# Altium PCB REF-Base.PcbDoc (part 1 of 2)
Units mm, origin at the board's own origin, x right, y up, seen from the top; angles counter-clockwise.
Board outline 48.01 x 58 mm, 4 copper layers (Top1, VCC, GND, Bottom2), stack 1.833 mm thick; 98 components, 129 nets, 444 pads, 192 vias.
Unrouted connection lines stored in the file: 57.
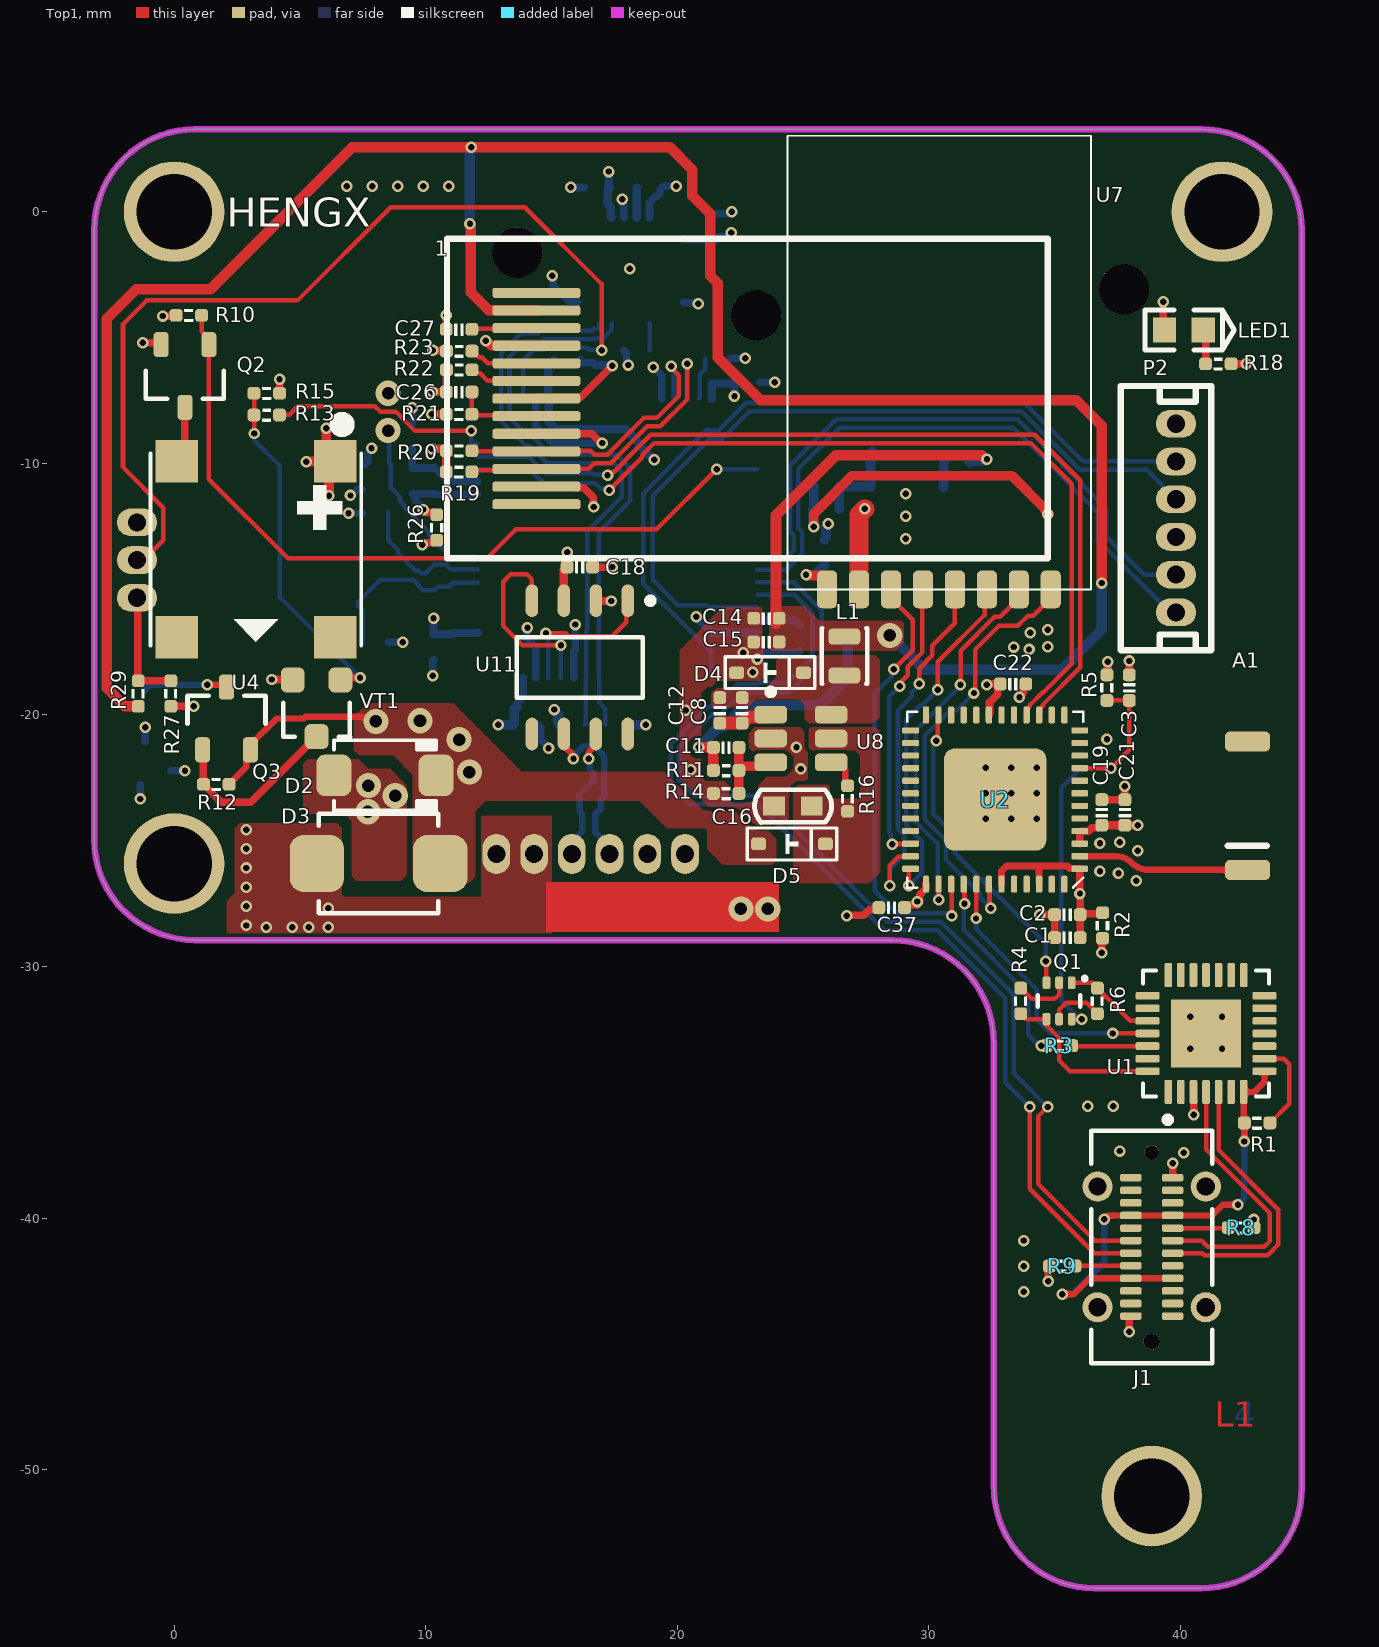
[diagram p0: Top1 view]
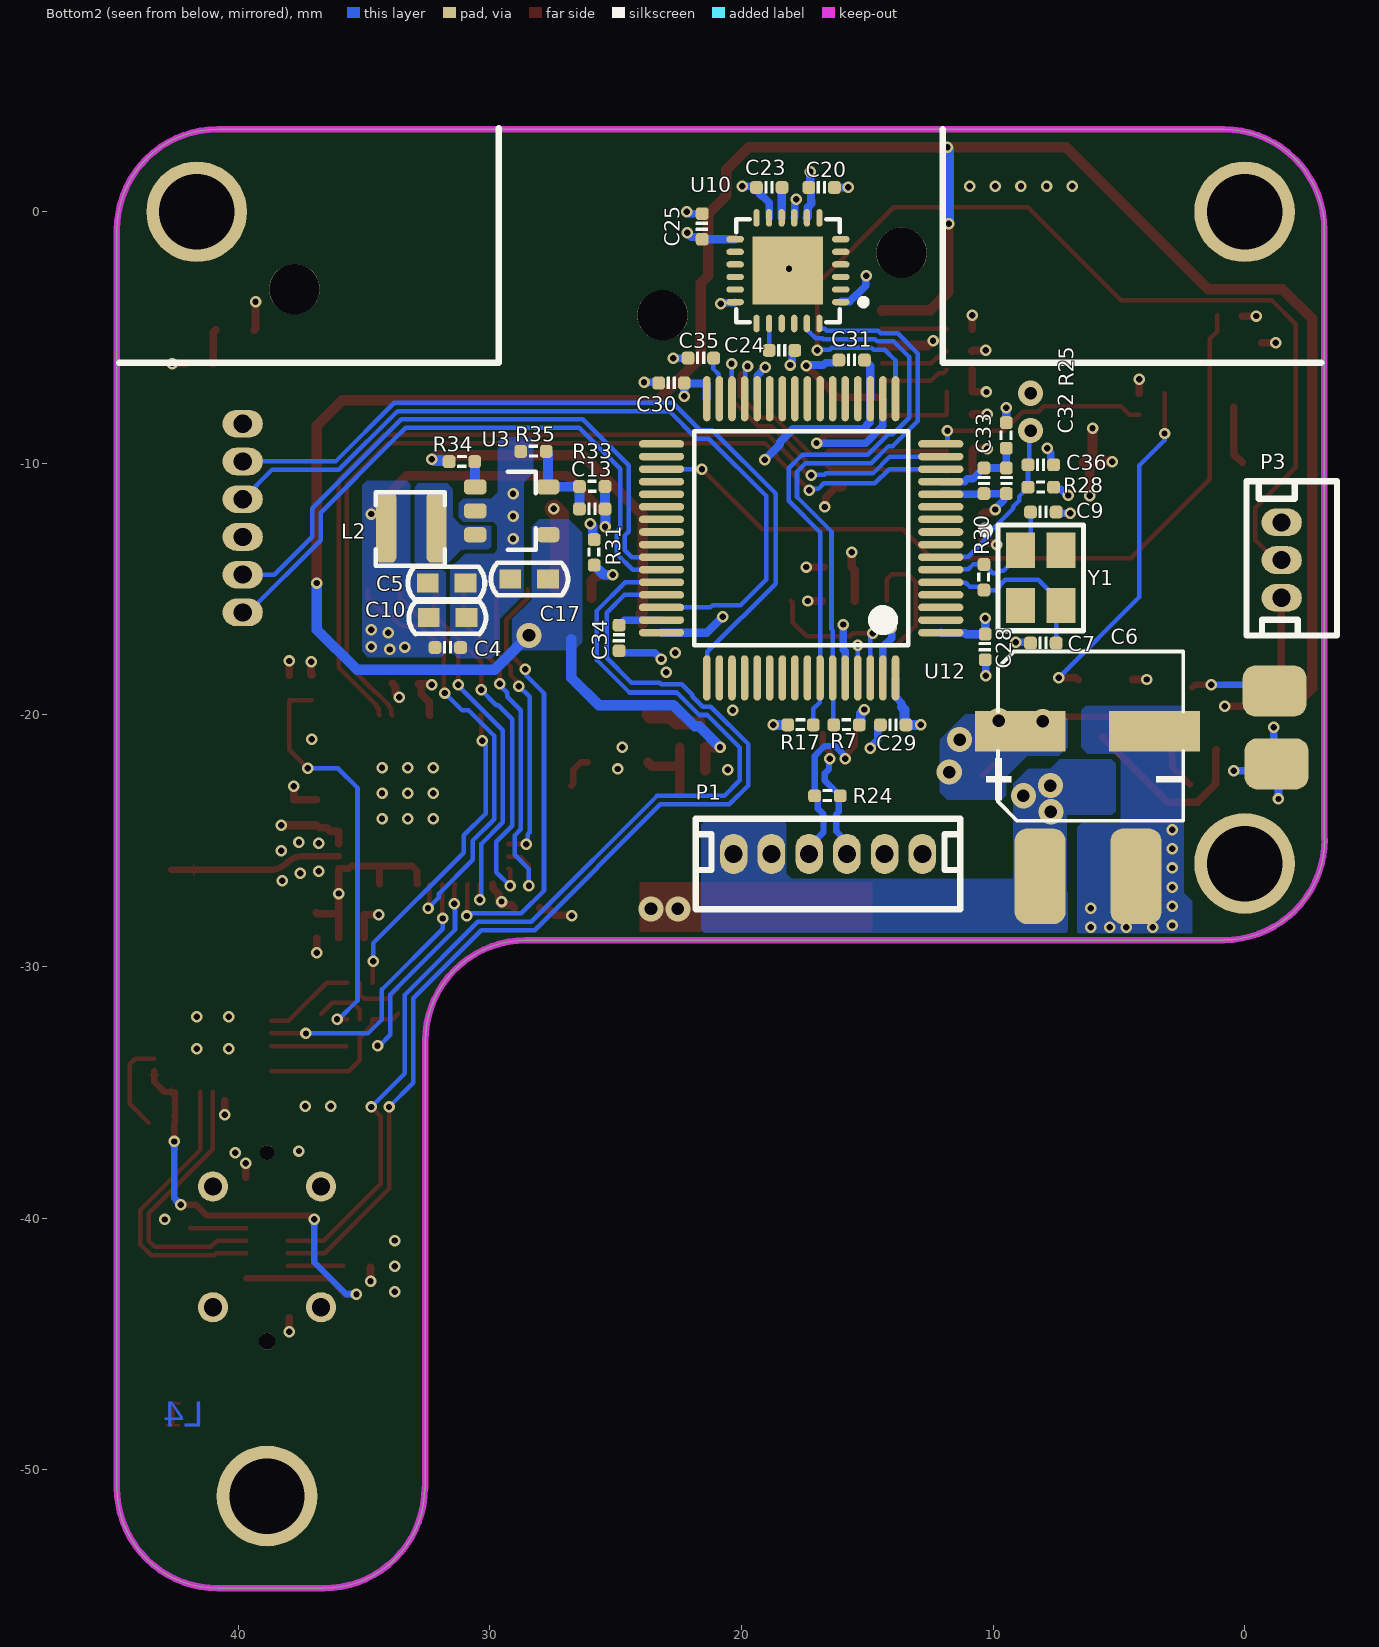
[diagram p1: Bottom2 view, seen from below]
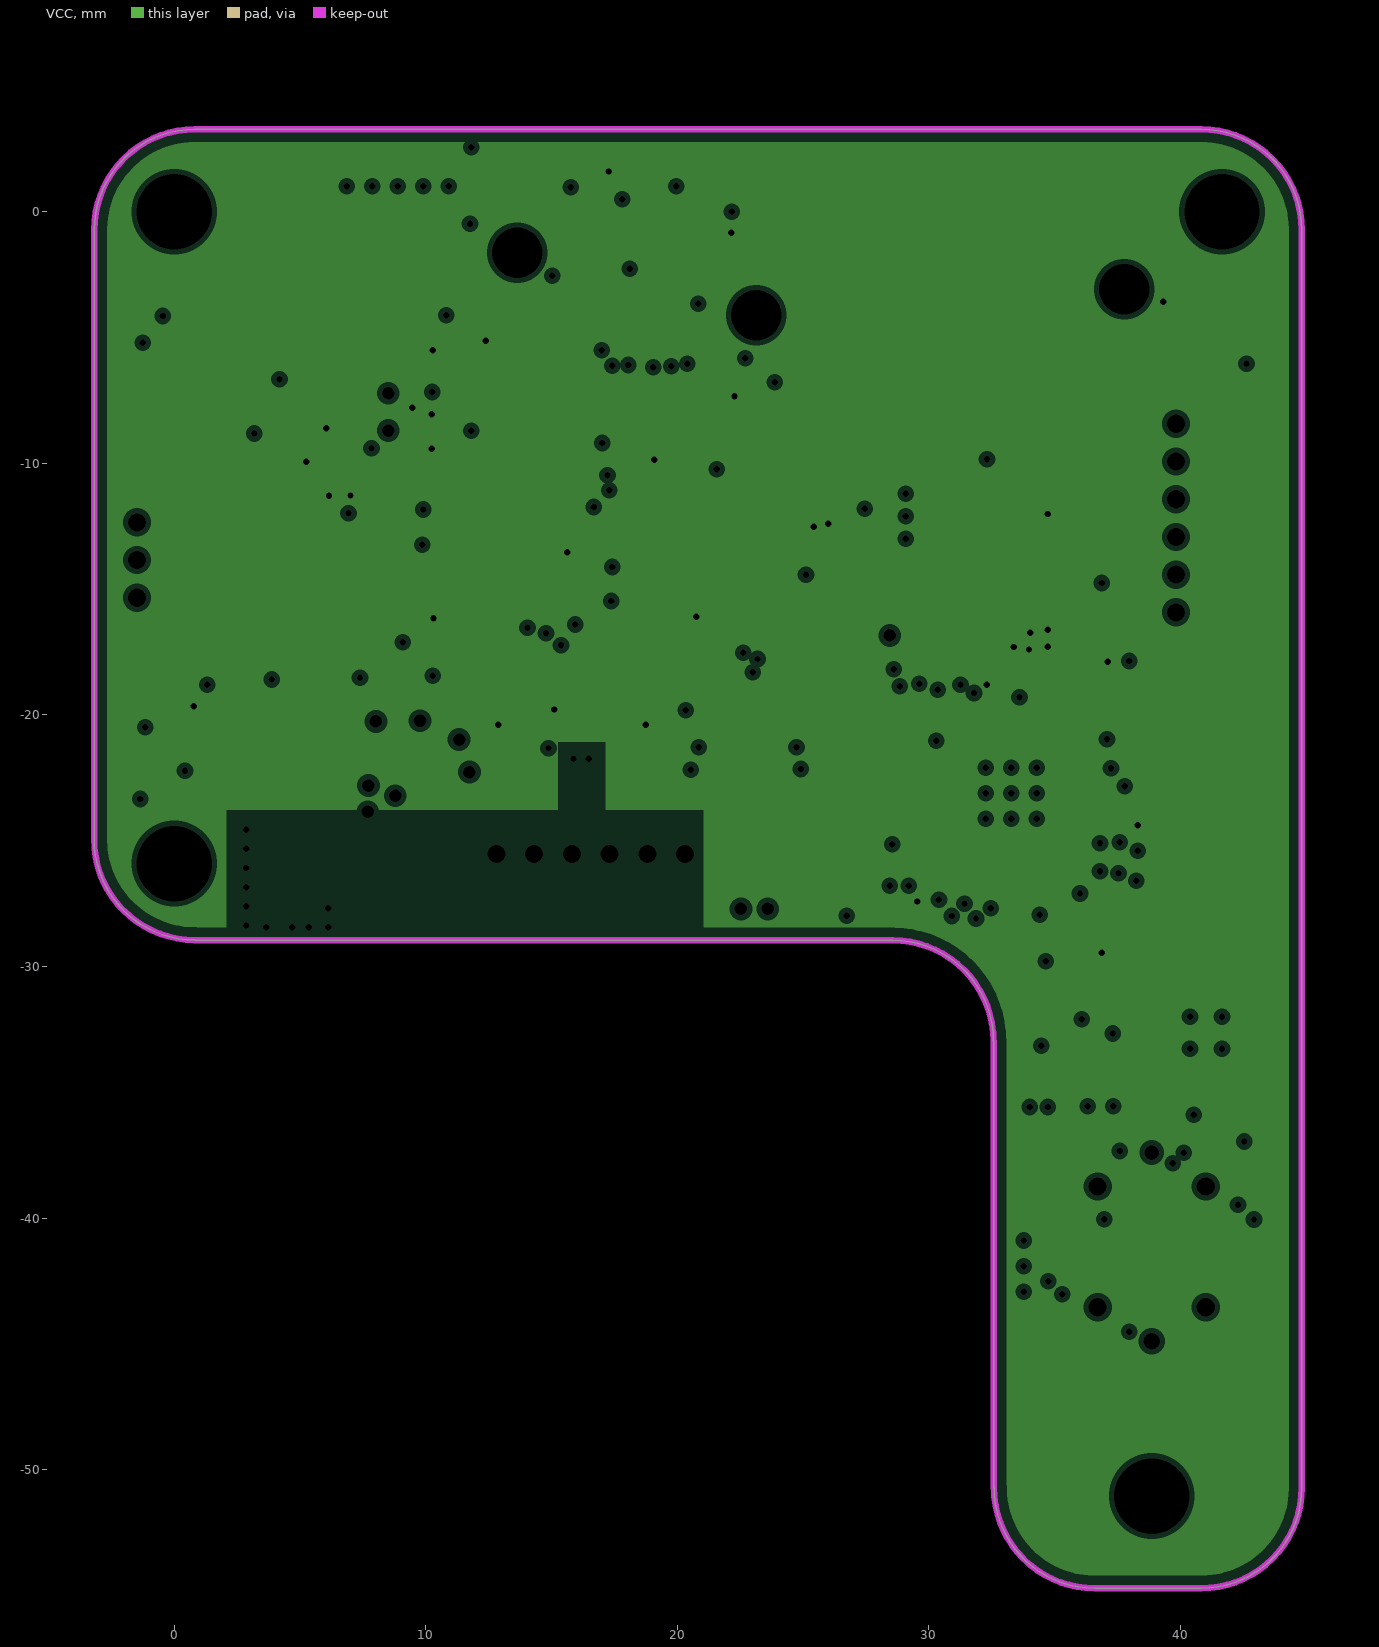
[diagram p2: VCC, clearances drawn from the general rule]
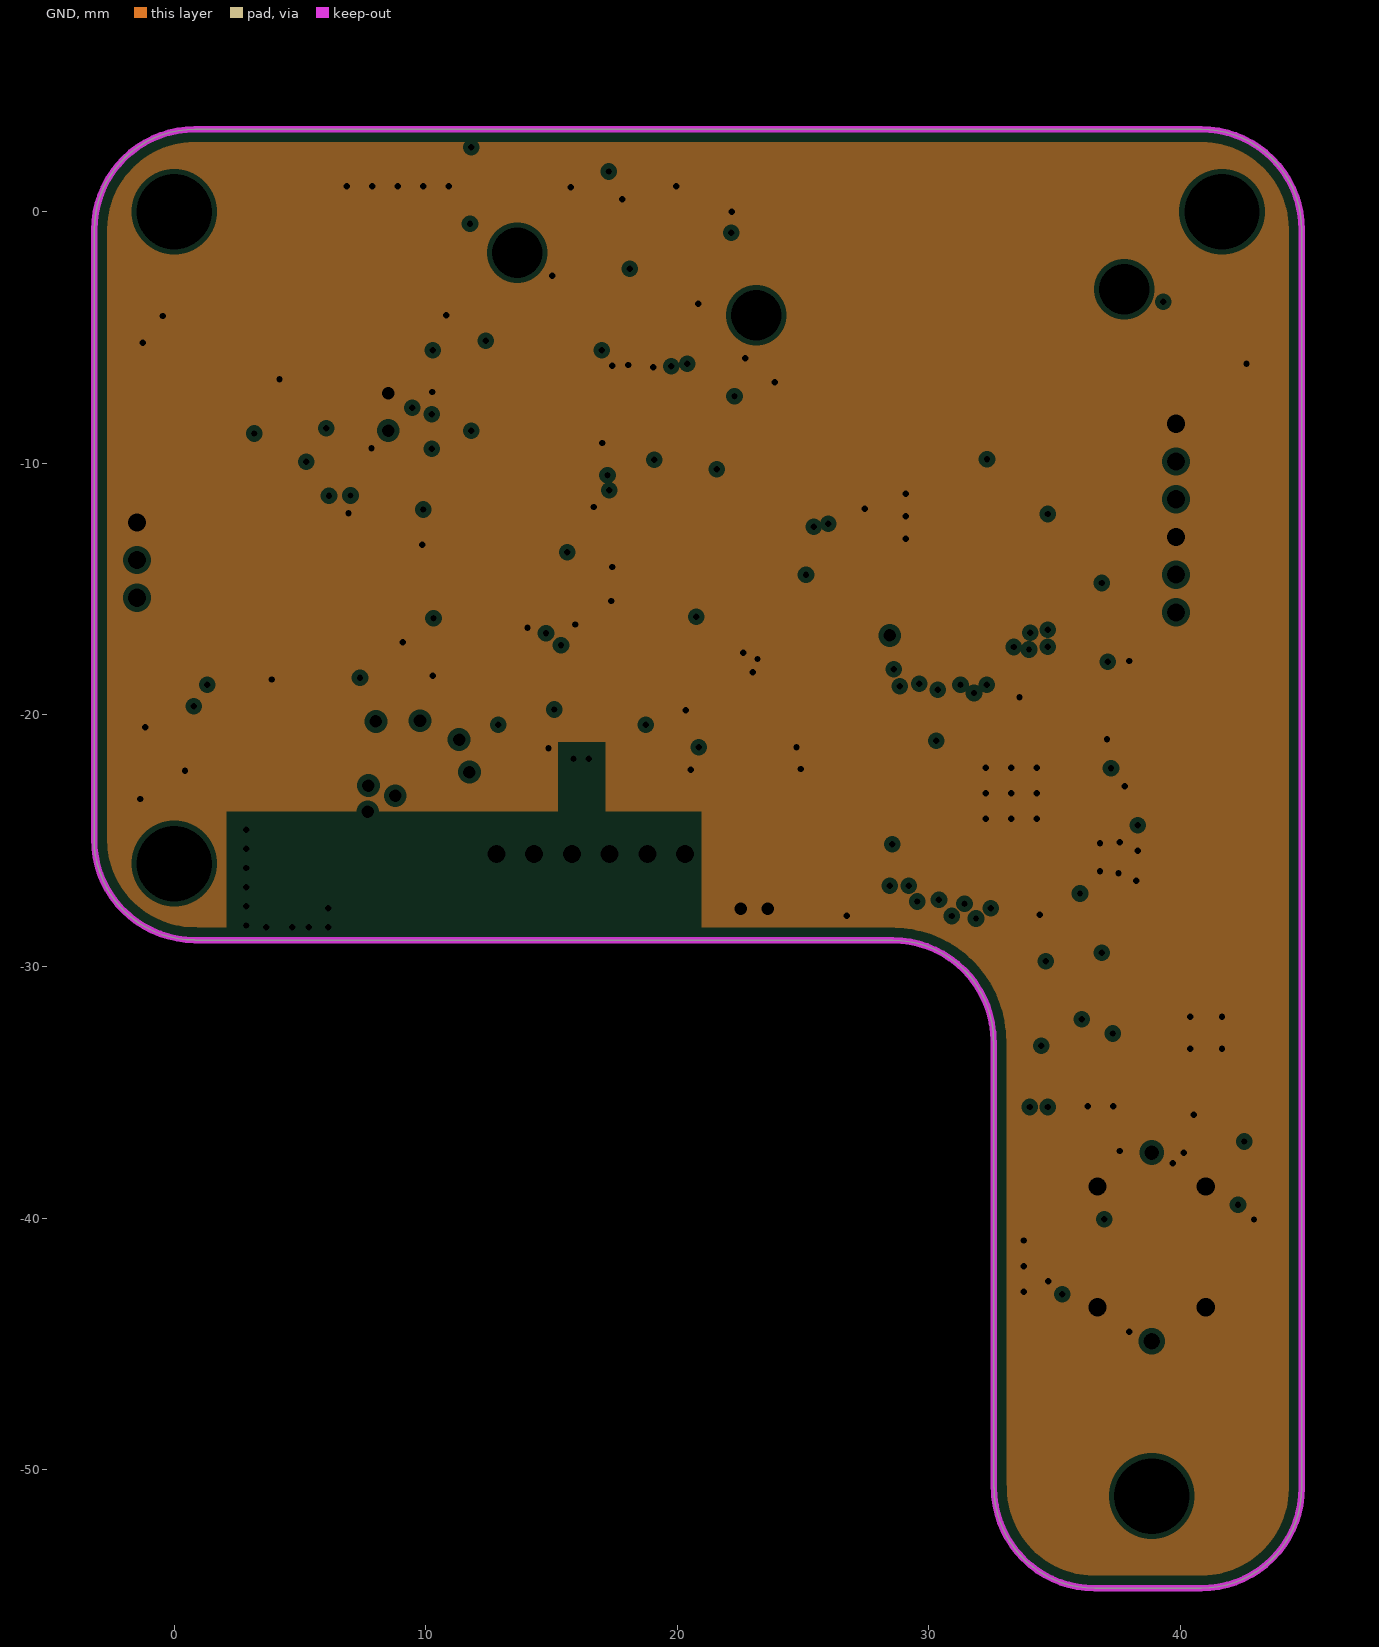
[diagram p3: GND, clearances drawn from the general rule]
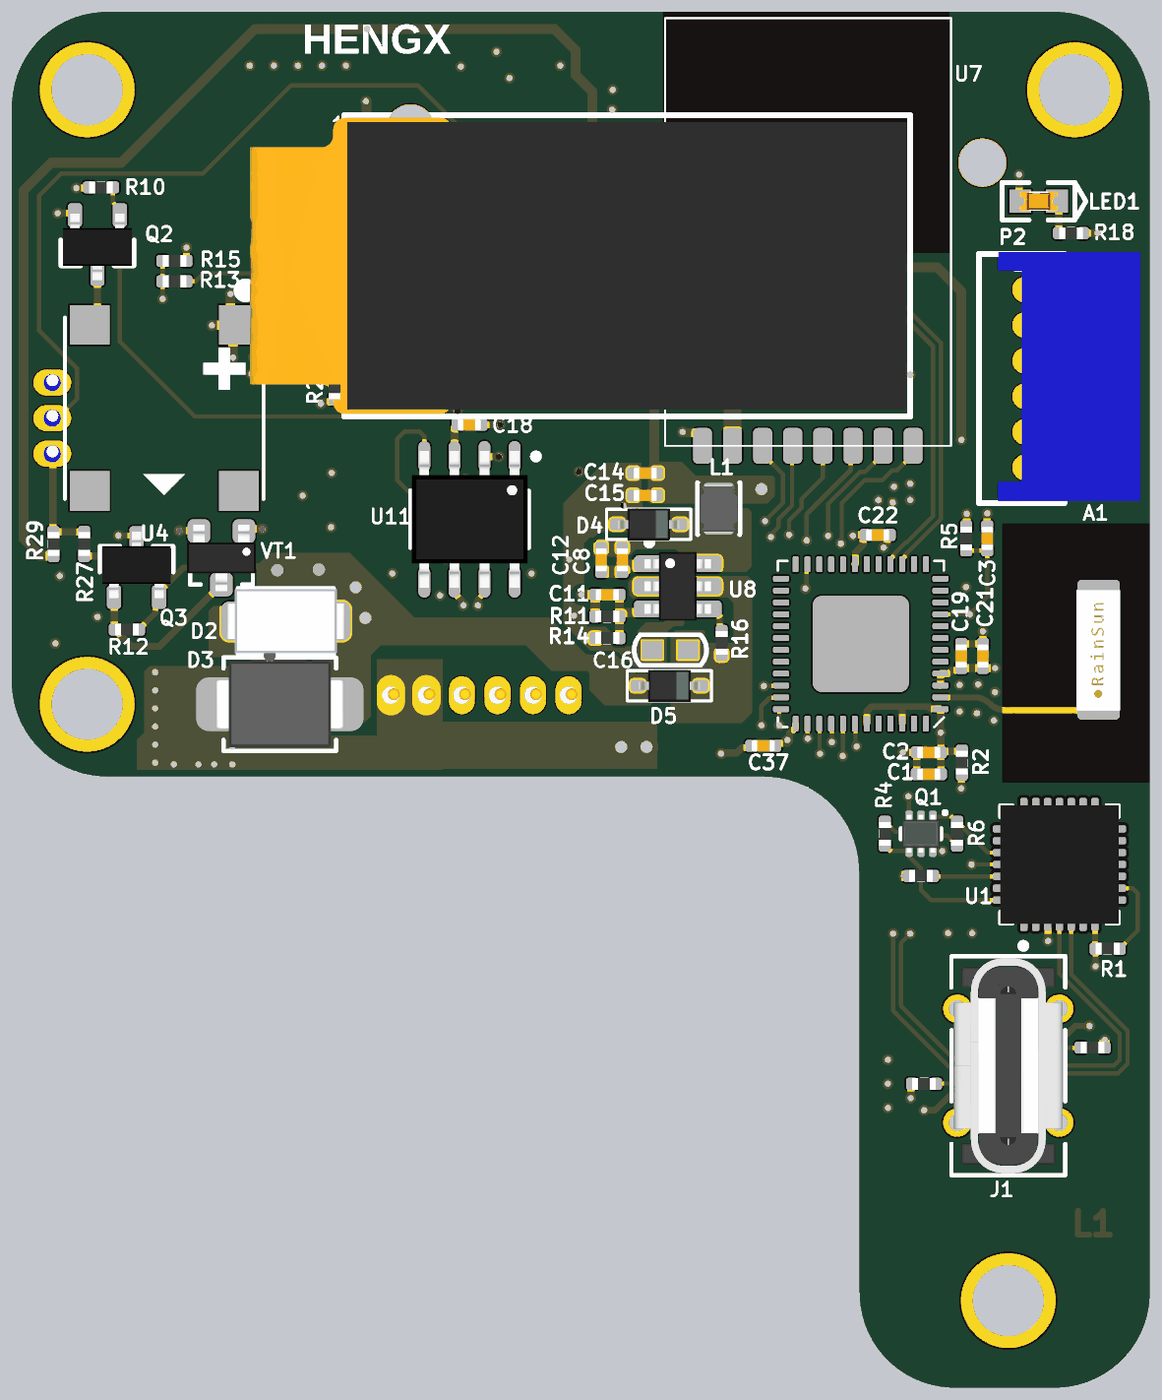
[diagram p5: 3D render of the assembled board from above, using the file's embedded part models]
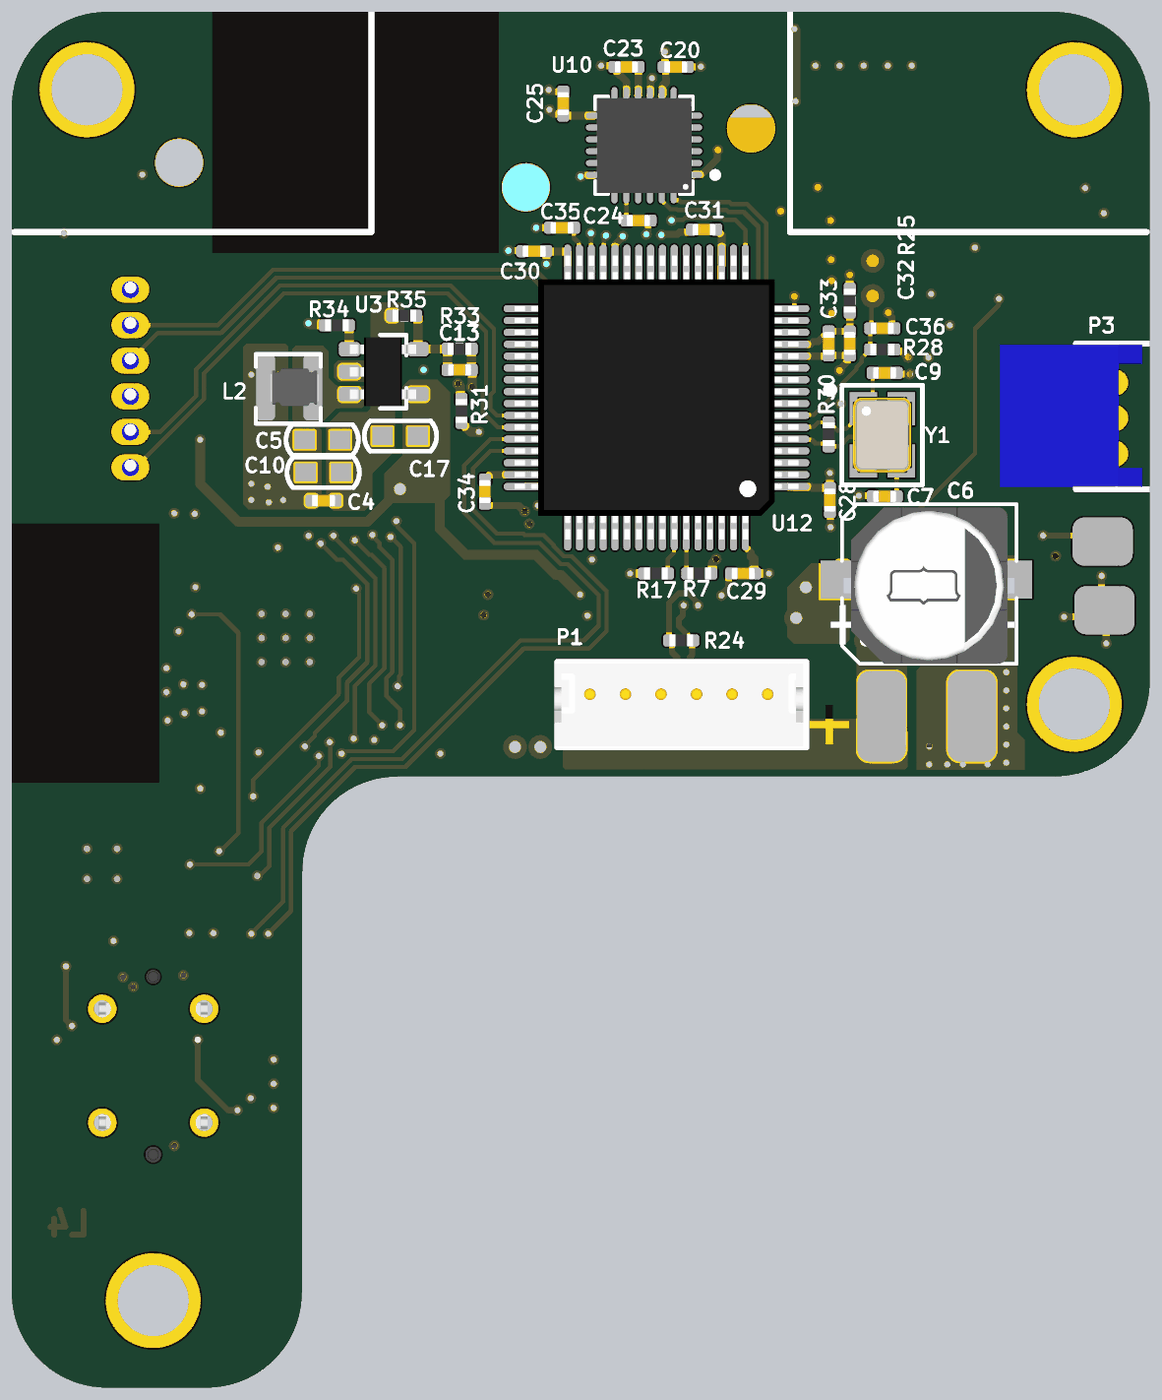
[diagram p6: 3D render of the assembled board from below, using the file's embedded part models]

## Layer stack, top to bottom
Top Solder: solder mask 0.0102, Solder Resist, Dk 3.5
Top1: signal copper 0.0356
Dielectric 1: prepreg 0.0711, PP-006, Dk 4.1
VCC: plane copper 0.035, net 3V3
Dielectric 2: prepreg 0.0711, PP-006, Dk 4.1
GND: plane copper 0.035, net GND
Dielectric1: core 1.55, FR-4, Dk 4.2
Bottom2: signal copper 0.0356
Bottom Solder: solder mask 0.0102, Solder Resist, Dk 3.5

## Board outline
-3.172,-24.948 -3.172,-0.719 cw(c0.828,-0.719) 0.828,3.281 40.828,3.281 cw(c40.828,-0.719) 44.828,-0.719 44.828,-50.719 cw(c40.828,-50.719) 40.828,-54.719 36.594,-54.719 cw(c36.594,-50.719) 32.594,-50.719 32.576,-50.737 32.576,-32.961 32.571,-32.961 ccw(c28.571,-32.961) 28.571,-28.961 28.571,-28.956 0.82,-28.956 0.82,-28.948 cw(c0.82,-24.948)

## Design rules (kind name [scope] priority, off if disabled: settings)
Clearance Clearance_Logo [InNetClass('Logo')] p1: gap=0.203 ignorepadtopadclearanceinfootprint=FALSE
Clearance [All] p2: gap=0.152 ignorepadtopadclearanceinfootprint=FALSE
ComponentClearance [All] p1: gap=0 collisioncheckmode=3 verticalgap=0 showdistances=FALSE
DiffPairsRouting [All] p1: maxlimit=0.229 minlimit=0.229 mostfreqgap=0.229 toplayer_minwidth=0.381 toplayer_maxwidth=0.381 toplayer_prefwidth=0.381 bottomlayer_minwidth=0.381 bottomlayer_maxwidth=0.381 bottomlayer_prefwidth=0.381 maxuncoupledlength=12.7
FanoutControl Fanout_BGA [All] p1: bgadir=Out bgaviamode=Centered fanoutstyle=Auto fanoutdirection=Alternating viagrid=0.025 // Fanout_BGA (Default Rule)
HoleSize [All] p1: absolutevalues=TRUE maxlimit=254 minlimit=0.203 maxpercent=80.000 minpercent=20.000
MinimumSolderMaskSliver [All] p1 off: minsoldermaskwidth=0.051
PlaneClearance [All] p1: clearance=0.203
PlaneConnect [All] p1: planeconnectstyle=Direct reliefexpansion=0.508 reliefentries=4 reliefconductorwidth=0.254 reliefairgap=0.254
PolygonConnect [All] p1: connectstyle=Direct reliefconductorwidth=0.254 reliefentries=4 polygonreliefangle="90 Angle" airgapwidth=0.254
RoomDefinition Main [InComponentClass('Main')] p1 off: confinementstyle=ConfineIn formatcopy=TRUE lockcomponents=FALSE outline -155.47,-131.137 -104.67,-131.137 -104.67,-105.737 -155.47,-105.737
RoutingVias [All] p1: holewidth=0.203 width=0.406 viastyle="Through Hole" minholewidth=0.152 minwidth=0.305 maxholewidth=0.711 maxwidth=1.27
SilkToSilkClearance [All] p1: silktosilkclearance=0
SilkToSolderMaskClearance [IsPad] p1: minsilkscreentomaskgap=0 clearancetoexposedcopper=TRUE
SolderMaskExpansion [All] p1: expansion=0.076 istentingtop=FALSE
Width Logo [InNetClass('Logo')] p1: maxlimit=2.54 minlimit=0.003 preferedwidth=0.254
Width GND [(InNet('AGND') OR InNet('GND'))] p2: maxlimit=1.27 minlimit=0.102 preferedwidth=0.254
Width VCC [(InNet('VDD_SYS_3.3V') OR InNet('VDD_AV_3.3V') OR InNet('VDD_5V') OR InNet('VDD1V2-SYS') OR InNet('VDD1V1-EPHY') OR InNet('VDD-CPUX') OR InNet('VDD-CPUS') OR InNet('VDD-CPUFB') OR InNet('VCC-DRAM'))] p3: maxlimit=1.27 minlimit=0.102 preferedwidth=0.254
Width [All] p4: maxlimit=254 minlimit=0.102 preferedwidth=0.102
21 further rules are at their usual default settings.

## Components (designator, comment, footprint, x,y, rotation, side; value= is the part's Value field where it differs from the comment)
1 "OLED-12880" OLED-12880 14.402,-7.425 r180 top locked
A1 "RAINSUN" ANT-Rainsun-AN5120 42.672,-23.622 r90 top
C1 "10uF" CAP_0402 35.509,-28.854 r0 top value=0.1u
C2 "0.1uF" CAP_0402 35.509,-27.94 r0 top value=0.1u
C3 "1uF" CAP_0402 37.973,-18.917 r90 top value=0.1u
C4 "0.1uF" CAP_0402 31.674,-17.323 r0 bottom value=0.1u
C5 "22uF" C0603 31.741,-14.754 r0 bottom
C6 "220uF/25V" CAP-SMD_BD8.0-L8.3-W8.3-LS9.3-FD 6.375,-20.65 r180 bottom value=150uF/35V
C7 "20pF" CAP_0402 8.001,-17.145 r0 bottom
C8 "0.1uF" CAP_0402 22.581,-19.82 r270 top value=0.1u
C9 "20pF" CAP_0402 8.001,-11.938 r180 bottom
C10 "22uF" C0603 31.699,-16.129 r0 bottom
C11 "100pF" CAP_0402 21.946,-21.293 r0 top value=0.1u
C12 "0.1uF" CAP_0402 21.692,-19.82 r270 top value=0.1u
C13 "22pF" CAP_0402 25.933,-11.811 r180 bottom
C14 "0.1uF" CAP_0402 23.546,-16.162 r0 top value=0.1u
C15 "10uF" CAP_0402 23.546,-17.102 r0 top value=0.1u
C16 "4.7uF" C0603 24.613,-23.63 r0 top value="4.7uF 35V"
C17 "22uF" C0603 28.423,-14.605 r180 bottom
C18 "0.1uF" CAP_0402 16.129,-14.122 r180 top value=0.1u
C19 "0.1uF" CAP_0402 36.881,-23.876 r270 top value=0.1u
C20 "10nF" CAP_0402 16.815,0.965 r180 bottom value=0.1u
C21 "0.1uF" CAP_0402 37.795,-23.876 r270 top value=0.1u
C22 "0.1uF" CAP_0402 33.35,-18.771 r180 top value=0.1u
C23 "0.1uF" CAP_0402 18.898,0.965 r0 bottom value=0.1u
C24 "2.2nF" CAP_0402 18.39,-5.512 r0 bottom value=0.1u
C25 "0.1uF" CAP_0402 21.565,-0.584 r270 bottom value=0.1u
C26 "10uF" CAP_0402 11.328,-7.163 r0 top value=0.1u
C27 "10uF" CAP_0402 11.328,-4.674 r0 top value=0.1u
C28 "0.1uF" CAP_0402 10.312,-17.297 r90 bottom value=0.1u
C29 "0.1uF" CAP_0402 13.97,-20.396 r180 bottom value=0.1u
C30 "0.1uF" CAP_0402 22.784,-6.807 r180 bottom value=0.1u
C31 "0.1uF" CAP_0402 15.621,-5.893 r180 bottom value=0.1u
C32 "0.1uF" CAP_0402 9.474,-10.693 r90 bottom value=0.1u
C33 "10uF" CAP_0402 10.363,-10.693 r90 bottom value=0.1u
C34 "10uF" CAP_0402 24.867,-16.942 r90 bottom value=0.1u
C35 "10uF" CAP_0402 21.615,-5.817 r180 bottom value=0.1u
C36 "0.1uF" CAP_0402 8.103,-10.058 r0 bottom value=0.1u
C37 "0.1uF" CAP_0402 28.524,-27.661 r0 top value=0.1u
D2 "SS54" DO-214AC 8.382,-22.403 r0 top
D3 "SMBJ28CA" SMBJ-CA_MFG 8.128,-25.908 r0 top
D4 "二极管-5819W" SOD-323 23.69,-18.321 r0 top
D5 "二极管-5819W" SOD-323 24.562,-25.129 r0 top
J1 "USB-TYPE-C-STAND" USB-TYPE-C-STAND 38.862,-41.148 r90 top
L1 "6.8uH" IND-201612 26.645,-17.661 r90 top
L2 "2.2uH" IND-252012A-2R2 33.122,-12.548 r0 bottom
LED1 "LED GREEN" LED-0603 40.138,-4.699 r180 top
P1 "Header 6H" CONN-TH_HC-ZH1.5-6A 16.561,-25.527 r180 bottom
P2 "Header 6H" CONN-TH_HC-ZH1.5-6A-s 39.827,-12.176 r270 top
P3 "Header 3" CONN-TH_HC-ZH1.5-3A-S -1.473,-13.844 r90 bottom locked
Q1 "BC847BVC-7" SOT563-6 35.179,-31.369 r180 top
Q2 "AO3400A" SOT23-3 0.432,-6.528 r270 top
Q3 "AO3401A" SOT23-3 2.083,-20.142 r90 top
R1 "10K" RES_0402_1 43.053,-36.22 r0 top value=22R
R2 "0R" RES_0402_1 36.906,-28.372 r90 top value=22R
R3 "200R" RES_0402_1 35.179,-33.147 r0 top value=22R
R4 "12K" RES_0402_1 33.655,-31.369 r90 top value=22R
R5 "10K" RES_0402_1 37.084,-18.917 r270 top value=22R
R6 "12K" RES_0402_1 36.703,-31.369 r270 top value=22R
R7 "2K" RES_0402_1 15.824,-20.396 r180 bottom value=22R
R8 "5.1K" RES_0402_1 42.418,-40.386 r0 top value=22R
R9 "5.1K" RES_0402_1 35.306,-41.91 r180 top value=22R
R10 "10K" RES_0402_1 0.584,-4.115 r0 top value=22R
R11 "10K" RES_0402_1 21.946,-22.208 r180 top value=22R
R12 "2K" RES_0402_1 1.676,-22.758 r0 top value=22R
R13 "1K" RES_0402_1 3.683,-8.077 r180 top value=22R
R14 "1.8K" RES_0402_1 21.946,-23.122 r0 top value=22R
R15 "10K" RES_0402_1 3.683,-7.214 r0 top value=22R
R16 "1M" RES_0402_1 26.772,-23.325 r90 top value=22R
R17 "2K" RES_0402_1 17.653,-20.396 r0 bottom value=22R
R18 "2K" RES_0402_1 41.51,-6.045 r180 top value=22R
R19 "4.7K" RES_0402_1 11.328,-10.338 r180 top value=22R
R20 "4.7K" RES_0402_1 11.328,-9.5 r180 top value=22R
R21 "10K" RES_0402_1 11.328,-8.052 r180 top value=22R
R22 "560K" RES_0402_1 11.335,-6.279 r180 top value=22R
R23 "4.7K" RES_0402_1 11.335,-5.537 r180 top value=22R
R24 "120R/NC" RES_0402_1 16.586,-23.216 r0 bottom value=22R
R25 "0R" RES_0402_1 9.474,-8.89 r90 bottom value=22R
R26 "0R" RES_0402_1 10.439,-12.548 r270 top value=22R
R27 "0R" RES_0402_1 -0.127,-19.152 r270 top
R28 "10K" RES_0402_1 8.103,-10.947 r180 bottom value=22R
R29 "0R" RES_0402_1 -1.422,-19.152 r270 top
R30 "1M" RES_0402 10.363,-14.529 r90 bottom value=22R
R31 "0R" RES_0402_1 25.857,-13.538 r270 bottom
R33 "100K" RES_0402_1 25.933,-10.922 r180 bottom
R34 "10K" RES_0402_1 31.115,-9.931 r0 bottom value=22R
R35 "22.1K" RES_0402_1 28.27,-9.525 r180 bottom
U1 "CP2102" QFN-28 41.021,-32.664 r90 top value=Value
U2 "ESP32_SIP" QFN-48_7X7 32.639,-23.368 r180 top locked
U3 "SY8089 2A" SOT23-5 29.083,-11.887 r0 bottom
U4 "MLT-7525" BUZ-SMD_4P-L7.5-W7.5-P7.59-TL 3.251,-13.411 r270 top
U7 "NRF24L01" NRF24L01-MODULE 25.959,-15.011 r0 top locked
U8 "ME3116" SOT23-6 24.917,-20.938 r0 top
U10 "MPU6050" QFN-24 18.153,-2.341 r180 bottom
U11 "SN65HVD232D" SO-8 16.129,-18.11 r90 top
U12 "STM32F405RGT6" LQFP-64_N 17.628,-12.979 r180 bottom locked
VT1 "S8050" SMT_TRIODE_NPN 5.664,-19.736 r180 top
Y1 "XTAL-4" LC-SMD-3225_4P 8.103,-14.554 r270 bottom value=8MHz

## Footprints (in the part's own frame and the unit in brackets; to place one, negate y for a bottom-side part, rotate by r counter-clockwise, add the part's x,y. Pads: shape width x height; smd on the part's side, far side on the other; paste and mask are expansions set on the pad)
ANT-Rainsun-AN5120 [mm] "选择焊盘"
  rrect50% 0.8x1.8 smd: 1(-2.54,0) ""(2.563,0)
  silkscreen extent -1.57,-0.76 -1.57,0.79, body extent -2.57,-0.91 2.54,0.94, height 1.32
BUZ-SMD_4P-L7.5-W7.5-P7.59-TL [mm]
  rect 1.681x1.68 smd: 1(-3.497,3.15) 2(-3.497,-3.15) 3(3.497,-3.15) 4(3.497,3.15)
  silkscreen extent -5.2,-4.19 3.84,4.19, body extent -4.45,-4.06 4.45,4.06, height 2.5
C0603 [mm]
  rect 0.86x0.76 smd: 1(-0.768,0.005) 2(0.732,0.005)
  silkscreen extent -1.53,-0.64 1.52,0.65, body extent -1.5,-0.75 1.5,0.75, height 1.5
CAP-SMD_BD8.0-L8.3-W8.3-LS9.3-FD [mm]
  rect 3.6x1.6 smd: 1(-2.54,0) 2(2.794,0)
  silkscreen extent -3.9,-3.56 3.94,3.18, body extent -3.35,-3.55 3.85,3.05, height 7.7
CAP_0402 [mil]
  rrect50% 20x20 smd: 1(-20,0) 2(20,0)
  silkscreen extent -6,-9 6,9, body extent -20,-10 20,10, height 20
CONN-TH_HC-ZH1.5-3A-S [mm]
  oval 1.1x1.6 hole 0.72 paste+0 mask+0.05: 1(-1.5,0) 2(0,0) 3(1.5,0)
  silkscreen extent -3,-2.2 3.14,1.4, body extent -2.9,-1.39 3.1,4.61, height 4
CONN-TH_HC-ZH1.5-6A [mm]
  oval 1.1x1.6 hole 0.72 paste+0 mask+0.05: 1(-3.75,0) 2(-2.25,0) 3(-0.75,0) 4(0.75,0) 5(2.25,0) 6(3.75,0)
  silkscreen extent -5.25,-2.2 5.25,1.4, body extent -5.38,-2.16 5.12,1.34, height 4.04
CONN-TH_HC-ZH1.5-6A-s [mm]
  oval 1.1x1.6 hole 0.72 paste+0 mask+0.05: 1(-3.75,0) 2(-2.25,0) 3(-0.75,0) 4(0.75,0) 5(2.25,0) 6(3.75,0)
  silkscreen extent -5.25,-2.2 5.25,1.4, body extent -5.34,-1.4 5.16,4.6, height 4
DO-214AC [mil] "SMA"
  rrect50% 55x65 smd: 1(-80,0) 2(80,0)
  silkscreen extent -80,-55 80,55, body extent -98,-53 98,53, height 85
IND-201612 [mm]
  rrect50% 0.635x1.27 smd paste+0 mask+0: 1(-0.774,0) 2(0.774,0)
  silkscreen extent -1.1,-0.9 1.1,0.9, body extent -1,-0.8 1,0.8, height 0.95
IND-252012A-2R2 [mm]
  rrect50% 0.8x2.8 smd paste+0 mask+0: 1(-1,0) 2(1,0)
  silkscreen extent -1.33,-1.4 1.41,1.52, body extent -1.23,-0.8 0.77,0.8, height 0.95
LC-SMD-3225_4P [mm]
  rect 1.4x1.15 smd: 1(-1.1,-0.8) 2(1.1,-0.8) 3(1.1,0.8) 4(-1.1,0.8)
  silkscreen extent -2.1,-2.35 2.1,1.7, body extent -1.6,-1.25 1.6,1.25, height 0.61
LED-0603 [mm]
  rect 0.93x0.98 smd: A(0.77,0) C(-0.77,0)
  silkscreen extent -2,-0.79 1.54,0.79, body extent -0.8,-0.4 0.8,0.4, height 0.6
LQFP-64_N [mm] "Thin QFP, 64-Leads, Body 10x10mm, Pitch 0.5mm, IPC Medium Density"
  oval 1.8x0.3 smd: 1(5.55,-3.75) 2(5.55,-3.25) 3(5.55,-2.75) 4(5.55,-2.25) 5(5.55,-1.75) 6(5.55,-1.25) 7(5.55,-0.75) 8(5.55,-0.25) 9(5.55,0.25) 10(5.55,0.75) 11(5.55,1.25) 12(5.55,1.75) 13(5.55,2.25) 14(5.55,2.75) 15(5.55,3.25) 16(5.55,3.75) 33(-5.55,3.75) 34(-5.55,3.25) 35(-5.55,2.75) 36(-5.55,2.25) 37(-5.55,1.75) 38(-5.55,1.25) 39(-5.55,0.75) 40(-5.55,0.25) 41(-5.55,-0.25) 42(-5.55,-0.75) 43(-5.55,-1.25) 44(-5.55,-1.75) 45(-5.55,-2.25) 46(-5.55,-2.75) 47(-5.55,-3.25) 48(-5.55,-3.75)
  oval 0.3x1.8 smd: 17(3.75,5.55) 18(3.25,5.55) 19(2.75,5.55) 20(2.25,5.55) 21(1.75,5.55) 22(1.25,5.55) 23(0.75,5.55) 24(0.25,5.55) 25(-0.25,5.55) 26(-0.75,5.55) 27(-1.25,5.55) 28(-1.75,5.55) 29(-2.25,5.55) 30(-2.75,5.55) 31(-3.25,5.55) 32(-3.75,5.55) 49(-3.75,-5.55) 50(-3.25,-5.55) 51(-2.75,-5.55) 52(-2.25,-5.55) 53(-1.75,-5.55) 54(-1.25,-5.55) 55(-0.75,-5.55) 56(-0.25,-5.55) 57(0.25,-5.55) 58(0.75,-5.55) 59(1.25,-5.55) 60(1.75,-5.55) 61(2.25,-5.55) 62(2.75,-5.55) 63(3.25,-5.55) 64(3.75,-5.55)
  silkscreen extent -4.25,-4.25 4.25,4.25, body extent -5.98,-5.98 5.99,5.99, height 1.6
NRF24L01-MODULE [mm]
  rrect50% 0.8x1.5 smd: 1(0,0) 2(1.27,0) 3(2.54,0) 4(3.81,0) 5(5.08,0) 6(6.35,0) 7(7.62,0) 8(8.89,0)
  silkscreen extent -1.57,0 10.49,18.03
OLED-12880 [mm]
  rrect50% 3.5x0.4 smd: 1(0,-4.2) 2(0,-3.5) 3(0,-2.8) 4(0,-2.1) 5(0,-1.4) 6(0,-0.7) 7(0,0) 8(0,0.7) 9(0,1.4) 10(0,2.1) 11(0,2.8) 12(0,3.5) 13(0,4.2)
  silkscreen extent -20.32,-6.35 3.56,6.35, body extent -20.18,-6.25 7.54,6.25, height 1.55
QFN-24 [mm] "QFN, 24-Leads, Body 4.1x4.1mm (max), Pitch 0.50mm, IPC Low Density"
  oval 0.7x0.25 smd: 1(2.1,-1.25) 2(2.1,-0.75) 3(2.1,-0.25) 4(2.1,0.25) 5(2.1,0.75) 6(2.1,1.25) 13(-2.1,1.25) 14(-2.1,0.75) 15(-2.1,0.25) 16(-2.1,-0.25) 17(-2.1,-0.75) 18(-2.1,-1.25)
  oval 0.25x0.7 smd: 7(1.25,2.1) 8(0.75,2.1) 9(0.25,2.1) 10(-0.25,2.1) 11(-0.75,2.1) 12(-1.25,2.1) 19(-1.25,-2.1) 20(-0.75,-2.1) 21(-0.25,-2.1) 22(0.25,-2.1) 23(0.75,-2.1) 24(1.25,-2.1)
  rect 2.8x2.7 smd: ""(0,0)
  silkscreen extent -2.05,-2.05 3.12,2.05, body extent -2.02,-2.02 2.02,2.02, height 0.95
QFN-28 [mil]
  rrect50% 38x12 smd mask+5: 1(-91.5,59.06) 2(-91.5,39.37) 3(-91.5,19.68) 4(-91.5,0) 5(-91.5,-19.69) 6(-91.5,-39.37) 7(-91.5,-59.06) 15(91.5,-59.06) 16(91.5,-39.37) 17(91.5,-19.69) 18(91.5,0) 19(91.5,19.68) 20(91.5,39.37) 21(91.5,59.06)
  rrect50% 12x38 smd mask+5: 8(-59.06,-91.5) 9(-39.37,-91.5) 10(-19.68,-91.5) 11(0,-91.5) 12(19.68,-91.5) 13(39.37,-91.5) 14(59.06,-91.5) 22(59.06,91.5) 23(39.37,91.5) 24(19.68,91.5) 25(0,91.5) 26(-19.68,91.5) 27(-39.37,91.5) 28(-59.06,91.5)
  rect 106.3x110.24 smd: 29(0,0)
  silkscreen extent -140,-98 98,98, body extent -98,-98 98,98, height 35
QFN-48_7X7 [mm]
  rrect50% 0.675x0.25 smd: 1(-3.363,2.75) 2(-3.363,2.25) 3(-3.363,1.75) 4(-3.363,1.25) 5(-3.363,0.75) 6(-3.363,0.25) 7(-3.363,-0.25) 8(-3.363,-0.75) 9(-3.363,-1.25) 10(-3.363,-1.75) 11(-3.363,-2.25) 12(-3.363,-2.75) 25(3.363,-2.75) 26(3.363,-2.25) 27(3.363,-1.75) 28(3.363,-1.25) 29(3.363,-0.75) 30(3.363,-0.25) 31(3.363,0.25) 32(3.363,0.75) 33(3.363,1.25) 34(3.363,1.75) 35(3.363,2.25) 36(3.363,2.75)
  rrect50% 0.25x0.675 smd: 13(-2.75,-3.363) 14(-2.25,-3.363) 15(-1.75,-3.363) 16(-1.25,-3.363) 17(-0.75,-3.363) 18(-0.25,-3.363) 19(0.25,-3.363) 20(0.75,-3.363) 21(1.25,-3.363) 22(1.75,-3.363) 23(2.25,-3.363) 24(2.75,-3.363) 37(2.75,3.363) 38(2.25,3.363) 39(1.75,3.363) 40(1.25,3.363) 41(0.75,3.363) 42(0.25,3.363) 43(-0.25,3.363) 44(-0.75,3.363) 45(-1.25,3.363) 46(-1.75,3.363) 47(-2.25,3.363) 48(-2.75,3.363)
  rrect20% 4.064x4.064 smd: 49(0,0)
  silkscreen extent -3.5,-3.5 3.5,3.5, body extent -3.5,-3.5 3.5,3.5, height 1
RES_0402 [mil]
  rrect50% 20x20 smd: 1(-20,0) 2(20,0)
  silkscreen extent -7,-10 7,10, body extent -20,-10 20,10, height 14
RES_0402_1 [mil]
  rrect50% 20x20 smd: 1(-20,0) 2(20,0)
  silkscreen extent -6,-10 6,10, body extent -20,-10 20,10, height 14
SMBJ-CA_MFG [mm]
  rrect50% 2.16x2.26 smd paste+0 mask+0: 1(-2.45,0) 2(2.45,0)
  silkscreen extent -2.37,-1.97 2.37,1.97, body extent -2.7,-1.81 2.7,1.81, height 2.62
SMT_TRIODE_NPN [mm] "Surface mount NPN transistor, package SOT-23"
  rrect50% 0.95x1 smd: 1(-0.95,-1.125) 2(0.95,-1.125) 3(0,1.125)
  silkscreen extent -1.33,-0.22 1.32,1.13, body extent -1.45,-1.4 1.45,1.4, height 1.3
SO-8 [mm]
  oval 1.3x0.5 smd: 1(2.65,-1.905) 2(2.65,-0.635) 3(2.65,0.635) 4(2.65,1.905) 5(-2.65,1.905) 6(-2.65,0.635) 7(-2.65,-0.635) 8(-2.65,-1.905)
  silkscreen extent -1.2,-2.93 2.77,2.5, body extent -2.89,-2.46 2.89,2.44, height 1.45
SOD-323 [mm]
  rrect50% 0.6x0.5 smd: 1(-1.329,0) 2(1.329,0)
  silkscreen extent -1.78,-0.64 1.78,0.64, body extent -1.3,-0.68 1.3,0.67, height 1.15
SOT23-3 [mm] "SOT23, 3-Leads, Body 3.1x3.0mm (max), Pitch 0.95mm, IPC Medium Density"
  rrect50% 1x0.6 smd: 1(-1.246,0.95) 2(-1.246,-0.95) 3(1.246,0)
  silkscreen extent -0.2,-1.55 0.9,1.55, body extent -1.3,-1.45 1.5,1.45, height 1.2
SOT23-5 [mm] "SOT23, 3-Leads, Body 3.1x3.0mm (max), Pitch 0.95mm, IPC Medium Density"
  rrect50% 0.889x0.6 smd: 1(1.5,-0.95) 2(1.5,0) 3(1.5,0.95) 4(-1.396,0.95) 5(-1.396,-0.95)
  silkscreen extent -0.9,-1.55 0.2,1.55, body extent -1.32,-1.45 1.48,1.45, height 1.2
SOT23-6 [mm]
  rrect50% 1.3x0.7 smd: 1(-1.2,0.95) 2(-1.2,0) 3(-1.2,-0.95) 4(1.2,-0.95) 5(1.2,0) 6(1.2,0.95)
  silkscreen extent -1.32,1.73 -1.07,1.97, body extent -1.4,-1.45 1.4,1.45, height 1.45
SOT563-6 [mm]
  rrect50% 0.305x0.5 smd paste+0 mask+0: 1(-0.5,-0.723) 2(0,-0.723) 3(0.5,-0.723) 4(0.5,0.723) 5(0,0.723) 6(-0.5,0.723)
  silkscreen extent -1.09,-0.97 0.85,0.23, body extent -0.8,-0.8 0.8,0.8, height 0.6
USB-TYPE-C-STAND [mm]
  rrect50% 0.3x0.85 smd: A1(-2.75,0.83) A2(-2.25,0.83) A3(-1.75,0.83) A4(-1.25,0.83) A5(-0.75,0.83) A6(-0.25,0.83) A7(0.25,0.83) A8(0.75,0.83) A9(1.25,0.83) A10(1.75,0.83) A11(2.25,0.83) A12(2.75,0.83) B1(2.75,-0.83) B2(2.25,-0.83) B3(1.75,-0.83) B4(1.25,-0.83) B5(0.75,-0.83) B6(0.25,-0.83) B7(-0.25,-0.83) B8(-0.75,-0.83) B9(-1.25,-0.83) B10(-1.75,-0.83) B11(-2.25,-0.83) B12(-2.75,-0.83)
  round 1.2 hole 0.72: S1(-2.4,2.15) S2(2.4,2.15) S3(-2.4,-2.15) S4(2.4,-2.15)
  round 0.66 hole 0.66 unplated: ""(-3.75,0)
  round 0.58 hole 0.58 unplated: ""(3.75,0)
  silkscreen extent -4.62,-2.4 4.62,2.4, body extent -4.52,-2.3 4.52,2.3, height 7.39

## Part data
A1: library part ANT-Rainsun-AP5120
C1 C2 C3 C4 C5 C7 C8 C9 C10 C11 C12 C13 C14 C15 C16 C17 C18 C19 C20 C21 C22 C23 C24 C25 C26 C27 C28 C29 C30 C31 C32 C33 C34 C35 C36 C37: library part 电容-0402, "Capacitor"
C6: library part CAP, "Capacitor, chip, ceramic", Parameters="E22 CAP", PN=RVT1E221M0607, Price=0.038
D2: library part Diode_SMA, "Diode", Type=SMA
D4 D5: "40V"
J1: Package=None, Availability=Unavailable, DigiKey-Purchase-URL=https://snapeda.com/shop?store=DigiKey&id=3596593, MF="Wurth Electronics", MP=632722110112, Price=None, SnapEDA_Link=https://www.snapeda.com/parts/632722110112/Wurth%20Electronics%20Inc./view-part/3596593/?ref=snap
L1 L2: library part 电感-201612
LED1: library part LED, "LED GRN SGL RA 25mA 4.1V SMD", AGILE_PN=370-76642, CAD_APPROVED=Yes, CLASS=IC, HEIGHT=4.25MM, MFG_NAME01=Kingbright, MFG_PN01=AA4040ZGS, PN=19-217/G7C-AN1P2/3T, RoHS=Yes
P1 P2: "Header, 6-Pin, Right Angle", LatestRevisionDate=17-Jul-2002, LatestRevisionNote="Re-released for DXP Platform.", Publisher="Altium Limited"
P3: "Header, 3-Pin", LatestRevisionDate=17-Jul-2002, LatestRevisionNote="Re-released for DXP Platform.", Publisher="Altium Limited"
Q2: "N-MOS"
Q3: "P-MOS"
R1 R2 R3 R4 R5 R6 R7 R8 R9 R10 R11 R12 R13 R14 R15 R16 R17 R18 R19 R20 R21 R22 R23 R24 R25 R26 R27 R28 R29 R30 R31 R33 R34 R35: library part 电阻-0402, "Resistor"
U1: "USB转TTL", MFG #1="SILICON LABS", PART DESC="SINGLE-CHIP USB TO UART BRIDGE, QFN28, RoHS.", PART NUMBER=CP2102, RefDes=RefDes, Type=DEV
U2: library part ESP32-PICO
U3: library part SY8089, "LDO"
U4: library part DET402
U7: library part NRF24L01模块
U8: "DC-DC"
U10: "六轴传感器"
U11: Manufacturer="Texas Instruments", Manufacturer Part Number=SN65HVD232DR, Operating Temperature="-40癈 ~ 85癈", Package / Case="8-SOIC (0.154\", 3.90mm Width)", Supplier Device Package=8-SOIC, Supplier Part Number 1=296-26344-2-ND, Voltage - Supply="3 V ~ 3.6 V", Category="Integrated Circuits (ICs)", ComponentLink1Description=http://www.ti.com/lit/ds/symlink/sn65hvd230.pdf, ComponentLink1URL=http://www.ti.com/lit/ds/symlink/sn65hvd230.pdf, Data Rate=1Mbps, Duplex=Half, Mounting Type="Surface Mount", Number of Drivers/Receivers=1/1, Packaging="Tape & Reel (TR)", Part Status=Active, Pricing 1="2500=0.84375 (USD)", Pricing 2="1=2.05, 10=1.842, 100=1.4809, 500=1.21668, 1000=1.00811 (USD)", Protocol=CAN, RoHS="RoHS Compliant", Stock=5000, Supplier 1=Digi-Key, Supplier 2=Digi-Key, Supplier Part Number 2=296-26344-1-ND, Type=Transceiver
U12: "ARM Cortex-M4 32-bit MCU+FPU, 210 DMIPS, 1024 kB Flash, 192 kB Internal RAM, 51 I/Os, 64-pin LQFP, -40 to 85 degC, Tray", I/Os (High Current)=51, Manufacturer=STMicroelectronics, Operating Frequency(F) (Processor speed) (MHz)=168, Supplier Part Number 1=497-11767-ND, Supply Voltage(Vcc) max (V)=3.6, Supply Voltage(Vcc) min (V)=1.8, ComponentLink1Description="Manufacturer URL", ComponentLink1URL=http://www.st.com/web/en/home.html, ComponentLink2Description=Datasheet, ComponentLink2URL=http://www.st.com/st-web-ui/static/active/en/resource/technical/document/datasheet/DM00037051.pdf, ComponentLink3Description="Package Specification", ComponentLink3URL=http://www.st.com/st-web-ui/static/active/en/resource/technical/document/datasheet/DM00037051.pdf, Core="ARM Cortex-M4", D/A Converter=2x12-bit, DatasheetVersion="Rev. 4", FLASH Size (Prog) (kB)=1024, Internal RAM Size (kB)=192, Mounting Technology="Surface Mount", PackageDescription="64-Pin Low Profile Quad Flat Package, 10 x 10 mm Body, 0.5 mm Pitch", PackageReference=LQFP64, PackageVersion="Rev. 4, 06/2013", Packing=Tray, PartNumber=STM32F405RGT6, Supplier 1=Digi-Key, Supplier 2=Farnell, Supplier 3=Newark, Supplier 4=Mouser, Supplier Part Number 2=2064363, Supplier Part Number 3=73T2329, Supplier Part Number 4=511-STM32F405RGT6
VT1: library part SMT_TRIODE_NPN, "Surface mount NPN transistor, package SOT-23"
Y1: "Crystal", Distributors=Comet, Parameters="20ppm 20pF -20/+70C", Price=0.238

## Free pads (board coordinates)
  rrect50% 2.54x2.032 smd far side: ""(-1.27,-21.946) ""(-1.194,-19.05)
  round 4 hole 3: ""(0,-25.908) ""(0,0) ""(38.862,-51.054) ""(41.656,0)
  rrect50% 2.032x3.81 smd far side: ""(4.318,-26.416) ""(8.128,-26.416)
  round 2 hole 2: ""(13.64,-1.626) ""(23.139,-4.115) ""(37.77,-3.073)

## Via types
v1: diameter 0.457, hole 0.254, Top1 to Bottom2, tented both sides, 178 vias
v2: diameter 1, hole 0.5, Top1 to Bottom2, tented both sides, 12 vias
v3: diameter 0.457, hole 0.254, Top1 to Bottom2, 2 vias

## Nets (pads, with @x,y where several pads share a name; then routed paths per layer and width w, separated by ;. In a path a pad name is that pad's centre, name@x,y a point inside that pad or via, vN(x,y) a via of type N, cw(c..) or ccw(c..) an arc to the next point about the centre after c; other vN are vias at no path point)
3V3: 1.4 C4.2 C5.2 C10.2 C13.2 C18.2 C19.2 C20.1 C21.2 C22.2 C25.2 C28.2 C29.2 C30.2 C31.2 C37.2 L2.2 LED1.A R2.1 R5.1 R7.2 R17.2 R19.2 R20.2 R21.2 R23.2 R25.2 R27.2 R28.2 R31.1 R33.2 U2.3 U2.4 U2.19 U2.37 U4.1 U10.8 U10.13 U11.3 U12.1 U12.19 U12.32 U12.48 U12.64 | length 56.6
  Top1 w0.3: R27.2@-0.127,-19.66 v1(0.787,-19.66) v1@0.813,-19.685 ; C37.2@29.032,-27.661 29.136,-27.557 29.358,-27.557 29.497,-27.418 v1(29.539,-27.418) ; v1@29.539,-27.557 29.639,-27.456 29.639,-27.143 29.889,-26.893 U2.37@29.889,-26.731 ; v1(32.309,-18.803) 32.351,-18.803 32.391,-18.763 32.835,-18.763 C22.2@32.842,-18.771 32.738,-18.875 32.738,-19.179 32.414,-19.504 32.414,-19.981 U2.19@32.389,-20.005 ; U2.3@36.002,-25.118 U2.4@36.002,-24.618 36.355,-24.618 36.485,-24.488 36.777,-24.488 C19.2@36.881,-24.384 ; v1(36.877,-29.462) R2.1@36.877,-28.878 ; v1(39.319,-3.581) 39.319,-4.65 LED1.A@39.368,-4.699
  Top1 w0.33: v1(10.236,-9.423) 10.744,-9.423 R20.2@10.82,-9.5 R19.2@10.82,-10.338 ; v1(10.236,-8.052) R21.2@10.82,-8.052 ; v1(10.287,-5.512) 10.802,-5.512 R23.2@10.827,-5.537 ; U11.3@15.494,-15.46 15.494,-14.249 C18.2@15.621,-14.122 v1(15.621,-13.538) ; C19.2@36.957,-24.384 C21.2@37.795,-24.384 v1(38.303,-24.384) ; R5.1@37.084,-18.409 37.109,-18.383 v1(37.109,-17.882)
  Top1 w0.39: v1(5.258,-9.931) 6.368,-9.931 U4.1@6.401,-9.965 ; U4.1@6.045,-9.721 v1(6.045,-8.611) ; v1(6.157,-11.288) U4.1@6.157,-10.178 ; v1(12.387,-5.12) 12.405,-5.12 12.605,-5.32 14.397,-5.32 1.4@14.402,-5.325 ; v1(25.425,-12.522) 25.425,-12.008 26.943,-10.49 33.299,-10.49 34.617,-11.808 34.617,-11.852 34.722,-11.957 v1(34.722,-12.014)
  Bottom2 w0.3: v1(7.01,-11.278) 7.053,-11.278 7.307,-11.023 R28.2@7.483,-11.023 ; 13.629,-19.679 13.629,-19.528 13.878,-19.279 U12.64@13.878,-18.529
  Bottom2 w0.33: R25.2@9.474,-8.382 v1(9.474,-7.798) ; v1(10.312,-16.154) C28.2@10.312,-16.789 11.061,-16.789 11.106,-16.744 12.063,-16.744 U12.1@12.078,-16.729 ; C31.2@15.113,-5.893 14.878,-6.128 U12.19@14.878,-7.429 14.893,-7.444 14.893,-8.364 15.175,-8.647 17.966,-8.647 18.468,-9.149 18.468,-9.248 19.08,-9.86 v1(19.082,-9.86) ; v1(17.272,1.6) 17.272,1.016 C20.1@17.323,0.965 17.234,0.876 17.234,0.47 17.221,0.457 17.221,0.32 17.363,0.178 17.363,-0.201 U10.8@17.403,-0.241 ; U10.13@20.254,-1.091 21.564,-1.091 21.654,-1.003 21.984,-1.003 v1(22.149,-0.838) ; v1(20.752,-16.104) 21.378,-16.729 U12.48@23.178,-16.729 ; U12.32@21.378,-7.429 21.378,-6.841 21.393,-6.826 22.257,-6.826 C30.2@22.276,-6.807 v1(22.276,-7.341)
  Bottom2 w0.39: v1(12.878,-20.396) C29.2@13.462,-20.396 13.521,-20.337 13.521,-19.787 13.629,-19.679 ; v1(15.113,-19.787) 15.113,-19.805 15.257,-19.949 15.257,-20.337 R7.2@15.316,-20.396 ; R17.2@18.161,-20.396 v1(18.745,-20.396) ; v1@25.4,-12.395 25.4,-11.836 C13.2@25.425,-11.811 R33.2@25.425,-10.922 ; R31.1@25.857,-13.03 25.916,-12.971 25.916,-12.489 v1(26.01,-12.395)
  other v1: 33.985,-17.399 33.38,-17.302 34.722,-17.297 34.036,-16.739 34.722,-16.612
3V3A: C1.2 C2.2 R2.2 U2.1 U2.43 U2.46 | length 8.2
  Top1 w0.28: U2.43@32.889,-26.731 32.893,-26.726 32.893,-26.213 33.096,-26.01 34.468,-26.01 ; U2.46@34.389,-26.731 34.389,-26.088 34.468,-26.01 ; U2.1@36.002,-26.118 35.987,-26.103 35.601,-26.103 35.508,-26.01 34.468,-26.01
  Top1 w0.3: U2.1@36.002,-26.118 36.005,-26.122 36.005,-27.098 36.013,-27.106 36.013,-27.936 C2.2@36.017,-27.94 ; C1.2@36.017,-28.854 C2.2@36.017,-27.94 ; R2.2@36.906,-27.864 36.868,-27.902 36.055,-27.902 C2.2@36.017,-27.94
  other v1: 36.009,-27.102
ADC1_1: U12.10
ADC2_1: U12.11
ADC3_1: U12.24
ADC4_1: U12.25
AGND: C32.1 C33.1 R26.1 U12.12 | length 4
  Top1 w0.33: v1(9.906,-11.836) 9.94,-11.836 10.055,-11.951 10.35,-11.951 R26.1@10.439,-12.04
  Bottom2 w0.3: v1(9.906,-11.836) 9.906,-11.794 9.578,-11.466 9.578,-11.305 C32.1@9.474,-11.201 C33.1@10.363,-11.201 10.391,-11.229 U12.12@12.078,-11.229
AVCC: C32.2 C33.2 R25.1 U12.13 | length 3.6
  Bottom2 w0.3: R25.1@9.474,-9.398 C32.2@9.474,-10.185 C33.2@10.363,-10.185 10.795,-10.617 11.024,-10.617 11.136,-10.729 U12.13@12.078,-10.729
BOOT_1: Q1.3 U2.23 | length 12.6
  Top1 w0.18: v1(30.302,-21.031) 30.354,-20.979 30.354,-20.041 U2.23@30.389,-20.005 ; v1(34.646,-29.794) 34.662,-29.811 34.662,-30.629 Q1.3@34.679,-30.646
  Bottom2 w0.18: v1(30.302,-21.031) 30.302,-21.106 30.175,-21.233 30.175,-23.927 31.039,-24.79 31.039,-25.476 34.646,-29.083 v1(34.646,-29.794)
BUZZ_1: Q2.1 R10.2 U12.35 | length 31.2
  Top1 w0.18: R10.2@1.092,-4.115 1.092,-4.76 1.382,-5.049 Q2.1@1.382,-5.282 1.382,-10.627 4.529,-13.775 12.438,-13.775 13.589,-12.624 19.177,-12.624 v1(21.571,-10.229)
  Bottom2 w0.18: v1@21.539,-10.262 v1(21.571,-10.229) U12.35@23.178,-10.229
CAN1_D_1: U11.1 U12.62 | length 6.2
  Top1 w0.18: v1(14.783,-16.759) 15.573,-16.759 15.693,-16.879 17.411,-16.879 17.973,-16.317 17.973,-15.521 U11.1@18.034,-15.46
  Bottom2 w0.18: v1(14.783,-16.759) 14.783,-16.833 14.878,-16.928 U12.62@14.878,-18.529
CAN1_H_1: P1.4 R24.1 U11.7 | length 5.5
  Top1 w0.254: v1(16.485,-21.742) 16.485,-21.488 16.764,-21.209 U11.7@16.764,-20.76
  Bottom2 w0.254: P1.4@15.811,-25.527 15.811,-25.048 16.231,-24.628 16.231,-23.952 16.129,-23.851 16.129,-23.266 R24.1@16.078,-23.216 16.688,-22.606 16.688,-22.327 16.523,-22.162 16.523,-21.781 v1(16.485,-21.742)
CAN1_L_1: P1.3 R24.2 U11.6 | length 6.9
  Top1 w0.254: U11.6@15.494,-20.76 15.494,-21.227 v1@15.824,-21.557
  Bottom2 w0.254: v1@15.868,-21.749 v1(15.875,-21.742) 15.875,-21.687 15.977,-21.586 15.977,-21.532 16.274,-21.234 16.695,-21.234 16.806,-21.345 17.094,-21.634 R24.2@17.094,-23.216 16.967,-23.343 16.967,-23.724 16.739,-23.952 16.739,-24.663 17.311,-25.235 P1.3@17.311,-25.527
CAN1_R_1: U11.4 U12.61 | length 7.9
  Top1 w0.18: U11.4@14.224,-15.46 14.224,-14.605 14.021,-14.402 13.386,-14.402 13.081,-14.707 13.081,-16.464 13.847,-17.229 v1(15.378,-17.229)
  Bottom2 w0.18: U12.61@15.378,-18.529 v1(15.378,-17.229) 15.378,-17.211 v1@15.392,-17.196
CAN2_D_1: U12.34
CAN2_R_1: U12.33
CP_Rx_1: U1.25 U2.41 | length 11
  Top1 w0.18: v1(31.877,-28.092) 31.891,-27.703 31.891,-27.313 31.889,-27.251 U2.41@31.889,-26.731 ; v1(37.313,-32.664) U1.25@38.697,-32.664
  Bottom2 w0.18: v1(31.877,-28.092) 31.877,-28.499 34.292,-30.914 34.292,-32.11 34.847,-32.664 v1(37.313,-32.664)
CP_Tx_1: R3.1 U2.40 | length 7.8
  Top1 w0.18: U2.40@31.389,-26.731 31.42,-26.978 v1(31.42,-27.508)
  Bottom2 w0.18: v1(31.42,-27.508) 31.389,-27.539 31.389,-28.544 33.96,-31.115 33.96,-32.715 34.392,-33.147 v1(34.468,-33.147)
DTR_1: Q1.4 R4.1 U1.28 | length 6.7
  Top1 w0.18: R4.1@33.655,-31.877 33.87,-32.092 Q1.4@34.679,-32.092 34.679,-32.342 35.179,-32.842 35.179,-33.731 35.612,-34.164 U1.28@38.697,-34.164
ENCODER1_A_1: U12.50
ENCODER1_B_1: U12.55
ENCODER2_A_1: U12.37
ENCODER2_B_1: U12.38
ESP_EN_1: C3.1 Q1.6 R5.2 U2.9 | length 17.4
  Top1 w0.18: Q1.6@35.679,-32.092 35.684,-32.097 36.073,-32.097 v1(36.078,-32.102) ; U2.9@36.002,-22.118 v1(37.242,-22.118) 37.973,-21.387 C3.1@37.973,-19.425 R5.2@37.084,-19.425
  Bottom2 w0.18: v1(36.078,-32.102) 36.014,-32.102 35.265,-31.354 35.265,-22.901 36.048,-22.118 v1(37.242,-22.118)
FLASH_CLK_1: U2.31
FLASH_CS_1: U2.25
FLASH_SD0_1: U2.27
FLASH_SD1_1: U2.33
FLASH_SD2_1: U2.30
FLASH_SD3_1: U2.32